# EAGLE board smd-reflow-1-rendered (EAGLE 7.2.0)
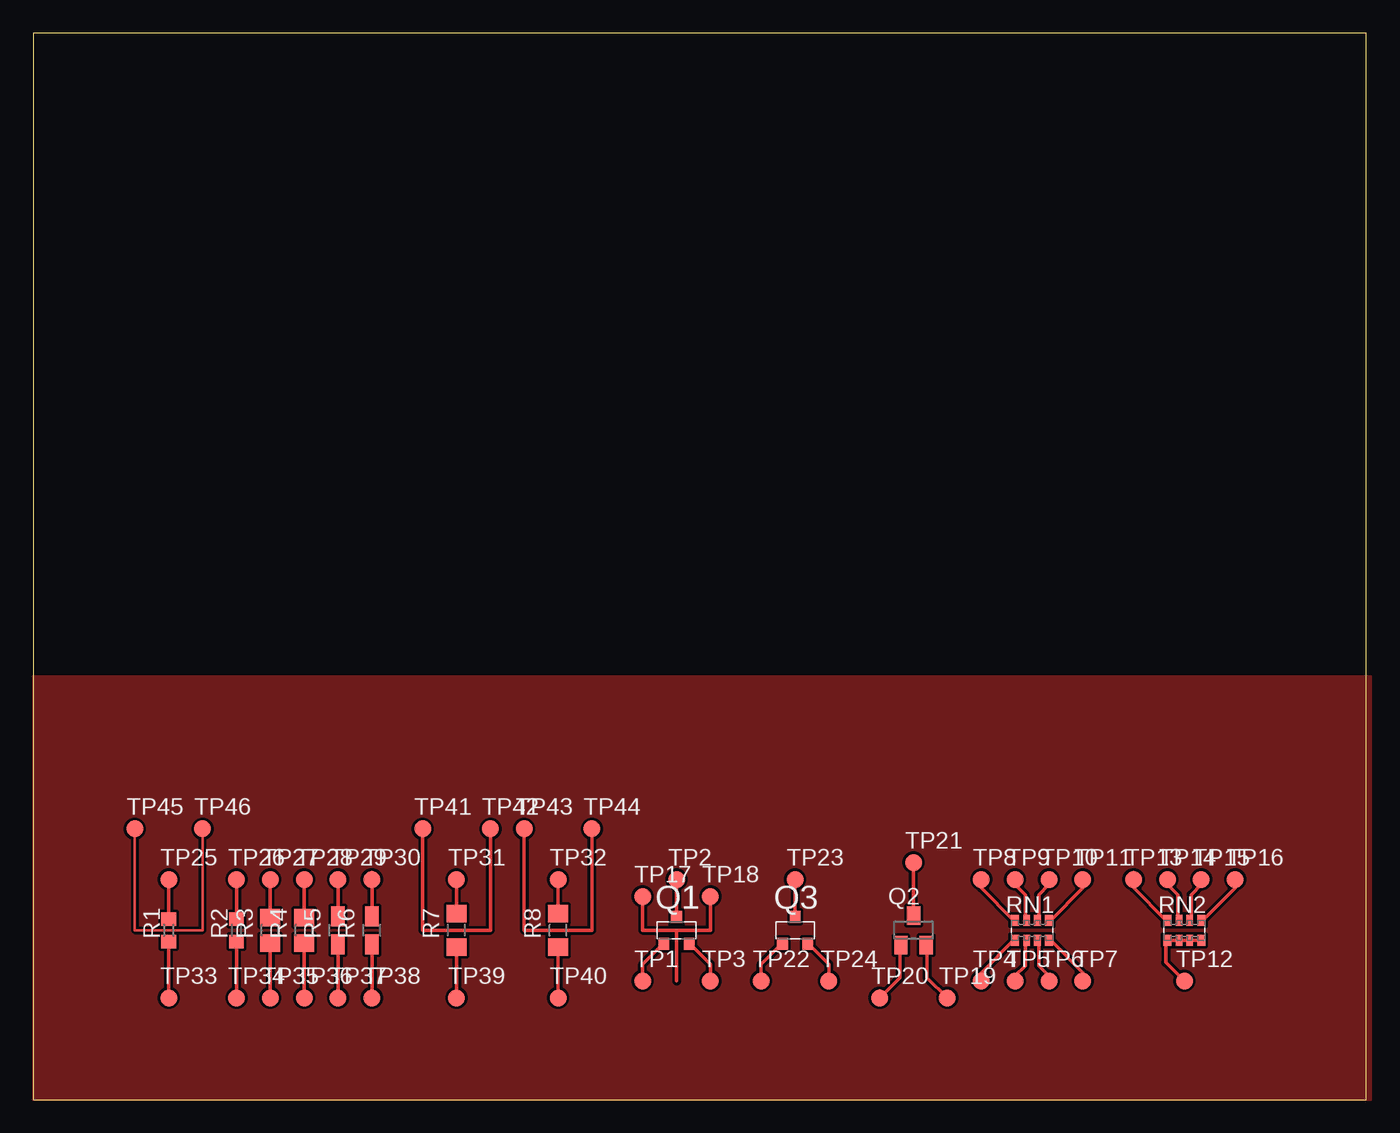
[diagram p0: board, top side]

Size 100 x 80 mm. Coordinates in mm from the lower left corner, seen from the top.
Outline: 0,0 100,0 100,80 0,80 0,0
Copper layers (1*16): Top 0.035mm / dielectric 1.5mm / Bottom 0.035mm
Design rules "default *": minimum track width 10mil, minimum drill 24mil, track to track 8mil, track to pad 8mil, pad to pad 8mil, via to via 8mil, smd to smd 8mil, copper to edge 0mil, drill to drill 8mil, minimum pad ring 10mil, minimum via ring 8mil, stop-mask expansion 4mil, vias tented up to drill 0mil, thermal gap 10mil
Net classes: 1 pwr: width 0.254 mm; 2 hipwr: width 0.5 mm

## Footprints (pad centres in the part's own frame; a part is rotated, then mirrored left to right if it is on the bottom)
MICRO3 = smd 0.8 x 0.9: 1 -0.95,-1; 2 0.95,-1; 3 0,1
SOT23 = smd 1 x 1.4: 1 -0.95,-1.1; 2 0.95,-1.1; 3 0,1.1
R0603 = smd 1 x 1.1: 1 -0.85,0; 2 0.85,0
R0805 = smd 1.3 x 1.5: 1 -0.95,0; 2 0.95,0
R0805W = smd 1.5 x 1: 1 -1.052,0; 2 1.052,0
R0805H = smd 1.3 x 1.5: 1 -1.255,0; 2 1.255,0
EXB38V = smd 0.6 x 0.8: 1 -1.275,-0.75; 4 1.275,-0.75; 5 1.275,0.75; 8 -1.275,0.75 | smd 0.5 x 0.8: 2 -0.4,-0.75; 3 0.4,-0.75; 6 0.4,0.75; 7 -0.4,0.75
B1,27 = smd 1.27 x 1.27: TP 0,0

## Placement (x,y rotation side)
Q1  IRLML2502  [MICRO3]  48.26,12.7 0 top
Q2  BSS84  [SOT23]  66.04,12.7 0 top
Q3  IRLML2502  [MICRO3]  57.15,12.7 0 top
R1  [R0603]  10.16,12.7 90 top
R2  [R0603]  15.24,12.7 90 top
R3  [R0805]  17.78,12.7 90 top
R4  [R0805]  20.32,12.7 90 top
R5  [R0805W]  22.86,12.7 90 top
R6  [R0805W]  25.4,12.7 90 top
R7  R-EU  [R0805H]  31.75,12.7 90 top
R8  R-EU  [R0805H]  39.37,12.7 90 top
RN1  [EXB38V]  74.93,12.7 0 top
RN2  [EXB38V]  86.36,12.7 0 top
TP1  TPB1,27  [B1,27]  45.72,8.89 0 top
TP2  TPB1,27  [B1,27]  48.26,16.51 0 top
TP3  TPB1,27  [B1,27]  50.8,8.89 0 top
TP4  TPB1,27  [B1,27]  71.12,8.89 0 top
TP5  TPB1,27  [B1,27]  73.66,8.89 0 top
TP6  TPB1,27  [B1,27]  76.2,8.89 0 top
TP7  TPB1,27  [B1,27]  78.74,8.89 0 top
TP8  TPB1,27  [B1,27]  71.12,16.51 0 top
TP9  TPB1,27  [B1,27]  73.66,16.51 0 top
TP10  TPB1,27  [B1,27]  76.2,16.51 0 top
TP11  TPB1,27  [B1,27]  78.74,16.51 0 top
TP12  TPB1,27  [B1,27]  86.36,8.89 0 top
TP13  TPB1,27  [B1,27]  82.55,16.51 0 top
TP14  TPB1,27  [B1,27]  85.09,16.51 0 top
TP15  TPB1,27  [B1,27]  87.63,16.51 0 top
TP16  TPB1,27  [B1,27]  90.17,16.51 0 top
TP17  TPB1,27  [B1,27]  45.72,15.24 0 top
TP18  TPB1,27  [B1,27]  50.8,15.24 0 top
TP19  TPB1,27  [B1,27]  68.58,7.62 0 top
TP20  TPB1,27  [B1,27]  63.5,7.62 0 top
TP21  TPB1,27  [B1,27]  66.04,17.78 0 top
TP22  TPB1,27  [B1,27]  54.61,8.89 0 top
TP23  TPB1,27  [B1,27]  57.15,16.51 0 top
TP24  TPB1,27  [B1,27]  59.69,8.89 0 top
TP25  TPB1,27  [B1,27]  10.16,16.51 0 top
TP26  TPB1,27  [B1,27]  15.24,16.51 0 top
TP27  TPB1,27  [B1,27]  17.78,16.51 0 top
TP28  TPB1,27  [B1,27]  20.32,16.51 0 top
TP29  TPB1,27  [B1,27]  22.86,16.51 0 top
TP30  TPB1,27  [B1,27]  25.4,16.51 0 top
TP31  TPB1,27  [B1,27]  31.75,16.51 0 top
TP32  TPB1,27  [B1,27]  39.37,16.51 0 top
TP33  TPB1,27  [B1,27]  10.16,7.62 0 top
TP34  TPB1,27  [B1,27]  15.24,7.62 0 top
TP35  TPB1,27  [B1,27]  17.78,7.62 0 top
TP36  TPB1,27  [B1,27]  20.32,7.62 0 top
TP37  TPB1,27  [B1,27]  22.86,7.62 0 top
TP38  TPB1,27  [B1,27]  25.4,7.62 0 top
TP39  TPB1,27  [B1,27]  31.75,7.62 0 top
TP40  TPB1,27  [B1,27]  39.37,7.62 0 top
TP41  TPB1,27  [B1,27]  29.21,20.32 0 top
TP42  TPB1,27  [B1,27]  34.29,20.32 0 top
TP43  TPB1,27  [B1,27]  36.83,20.32 0 top
TP44  TPB1,27  [B1,27]  41.91,20.32 0 top
TP45  TPB1,27  [B1,27]  7.62,20.32 0 top
TP46  TPB1,27  [B1,27]  12.7,20.32 0 top

## Library data of the parts
Q1 Q3 R7 R8 = trainlib
Q2 = transistor-small-signal
R1-R6 = resistor
RN1 RN2 = resistor-dil; OC_FARNELL: unknown; OC_NEWARK: unknown
TP1-TP46 = testpad

## Nets
N$1: RN1.1 TP4.TP
N$2: RN1.2 TP5.TP
N$3: RN1.3 TP6.TP
N$4: RN1.4 TP7.TP
N$5: RN1.8 TP8.TP
N$6: RN1.7 TP9.TP
N$7: RN1.6 TP10.TP
N$8: RN1.5 TP11.TP
N$9: RN2.1 RN2.2 RN2.3 RN2.4 TP12.TP
N$10: RN2.8 TP13.TP
N$11: RN2.7 TP14.TP
N$12: RN2.6 TP15.TP
N$13: RN2.5 TP16.TP
N$14: Q1.3 TP2.TP
N$15: Q1.1 TP1.TP
N$16: Q1.2 TP3.TP
N$17: TP17.TP TP18.TP
N$18: Q2.2 TP19.TP
N$19: Q2.1 TP20.TP
N$20: Q2.3 TP21.TP
N$21: Q3.3 TP23.TP
N$22: Q3.1 TP22.TP
N$23: Q3.2 TP24.TP
N$24: R1.2 TP25.TP
N$25: R2.2 TP26.TP
N$26: R3.2 TP27.TP
N$27: R4.2 TP28.TP
N$28: R6.2 TP30.TP
N$29: R5.2 TP29.TP
N$30: R7.2 TP31.TP
N$31: R8.2 TP32.TP
N$32: R1.1 TP33.TP
N$33: R2.1 TP34.TP
N$34: R3.1 TP35.TP
N$35: R4.1 TP36.TP
N$36: R5.1 TP37.TP
N$37: R6.1 TP38.TP
N$38: R7.1 TP39.TP
N$39: R8.1 TP40.TP
N$40: TP41.TP TP42.TP
N$41: TP43.TP TP44.TP
N$42: TP45.TP TP46.TP

## Tracks (layer width: path | path; a pad name or v marks a point on that pad's centre or on a via)
N$1
  Top 0.254: TP4.TP 71.12,9.53 73.53,11.94 RN1.1
N$2
  Top 0.254: TP5.TP 73.66,9.27 74.42,10.03 74.42,11.94 RN1.2
N$3
  Top 0.254: TP6.TP 76.2,9.27 75.44,10.03 75.44,11.94 RN1.3
N$4
  Top 0.254: TP7.TP 78.74,9.53 76.33,11.94 RN1.4
N$5
  Top 0.254: TP8.TP 71.12,15.88 73.53,13.46 RN1.8
N$6
  Top 0.254: TP9.TP 73.66,16.13 74.42,15.37 74.42,13.46 RN1.7
N$7
  Top 0.254: TP10.TP 76.2,16.13 75.44,15.37 75.44,13.46 RN1.6
N$8
  Top 0.254: TP11.TP 78.74,15.88 76.33,13.46 RN1.5
N$9
  Top 0.254: RN2.4 87.63,11.94 86.87,11.94 RN2.3 86.74,11.94 85.98,11.94 RN2.2 85.85,11.94 85.09,11.94 RN2.1 84.96,11.94 84.96,10.29 TP12.TP
N$10
  Top 0.254: TP13.TP 82.55,15.88 84.96,13.46 RN2.8
N$11
  Top 0.254: TP14.TP 85.09,16.13 85.85,15.37 85.85,13.46 RN2.7
N$12
  Top 0.254: TP15.TP 87.63,16.13 86.87,15.37 86.87,13.46 RN2.6
N$13
  Top 0.254: TP16.TP 90.17,15.88 87.76,13.46 RN2.5
N$14
  Top 0.254: TP2.TP Q1.3
N$15
  Top 0.254: TP1.TP 45.72,10.16 47.24,11.68 Q1.1
N$16
  Top 0.254: TP3.TP 50.8,10.16 49.28,11.68 Q1.2
N$17
  Top 0.254: TP17.TP 45.72,12.7 48.26,12.7 | TP18.TP 50.8,12.7 48.26,12.7 | 48.26,12.7 48.26,8.89
N$18
  Top 0.254: TP19.TP 67.06,9.14 67.06,11.56 Q2.2
N$19
  Top 0.254: TP20.TP 65.02,9.14 65.02,11.56 Q2.1
N$20
  Top 0.254: Q2.3 TP21.TP
N$21
  Top 0.254: TP23.TP Q3.3
N$22
  Top 0.254: TP22.TP 54.61,10.16 56.13,11.68 Q3.1
N$23
  Top 0.254: TP24.TP 59.69,10.16 58.17,11.68 Q3.2
N$24
  Top 0.254: TP25.TP R1.2
N$25
  Top 0.254: TP26.TP R2.2
N$26
  Top 0.254: R3.2 TP27.TP
N$27
  Top 0.254: R4.2 TP28.TP
N$28
  Top 0.254: R6.2 TP30.TP
N$29
  Top 0.254: R5.2 TP29.TP
N$30
  Top 0.254: R7.2 TP31.TP
N$31
  Top 0.254: R8.2 TP32.TP
N$32
  Top 0.254: TP33.TP R1.1
N$33
  Top 0.254: TP34.TP R2.1
N$34
  Top 0.254: R3.1 TP35.TP
N$35
  Top 0.254: R4.1 TP36.TP
N$36
  Top 0.254: R5.1 TP37.TP
N$37
  Top 0.254: R6.1 TP38.TP
N$38
  Top 0.254: R7.1 TP39.TP
N$39
  Top 0.254: R8.1 TP40.TP
N$40
  Top 0.254: TP41.TP 29.21,12.7 34.29,12.7 TP42.TP
N$41
  Top 0.254: TP43.TP 36.83,12.7 41.91,12.7 TP44.TP
N$42
  Top 0.203: TP45.TP 7.62,12.7 12.7,12.7 TP46.TP
N$43
  pour Top: 0,31.75 100.33,31.75 100.33,0 0,0